# Altium PCB PCB1.PcbDoc
Units mil, origin at the board's own origin, x right, y up, seen from the top; angles counter-clockwise.
Board outline 6000 x 4000 mil, 2 copper layers (Top Layer, Bottom Layer); 97 components, 57 nets, 314 pads, 11 vias.
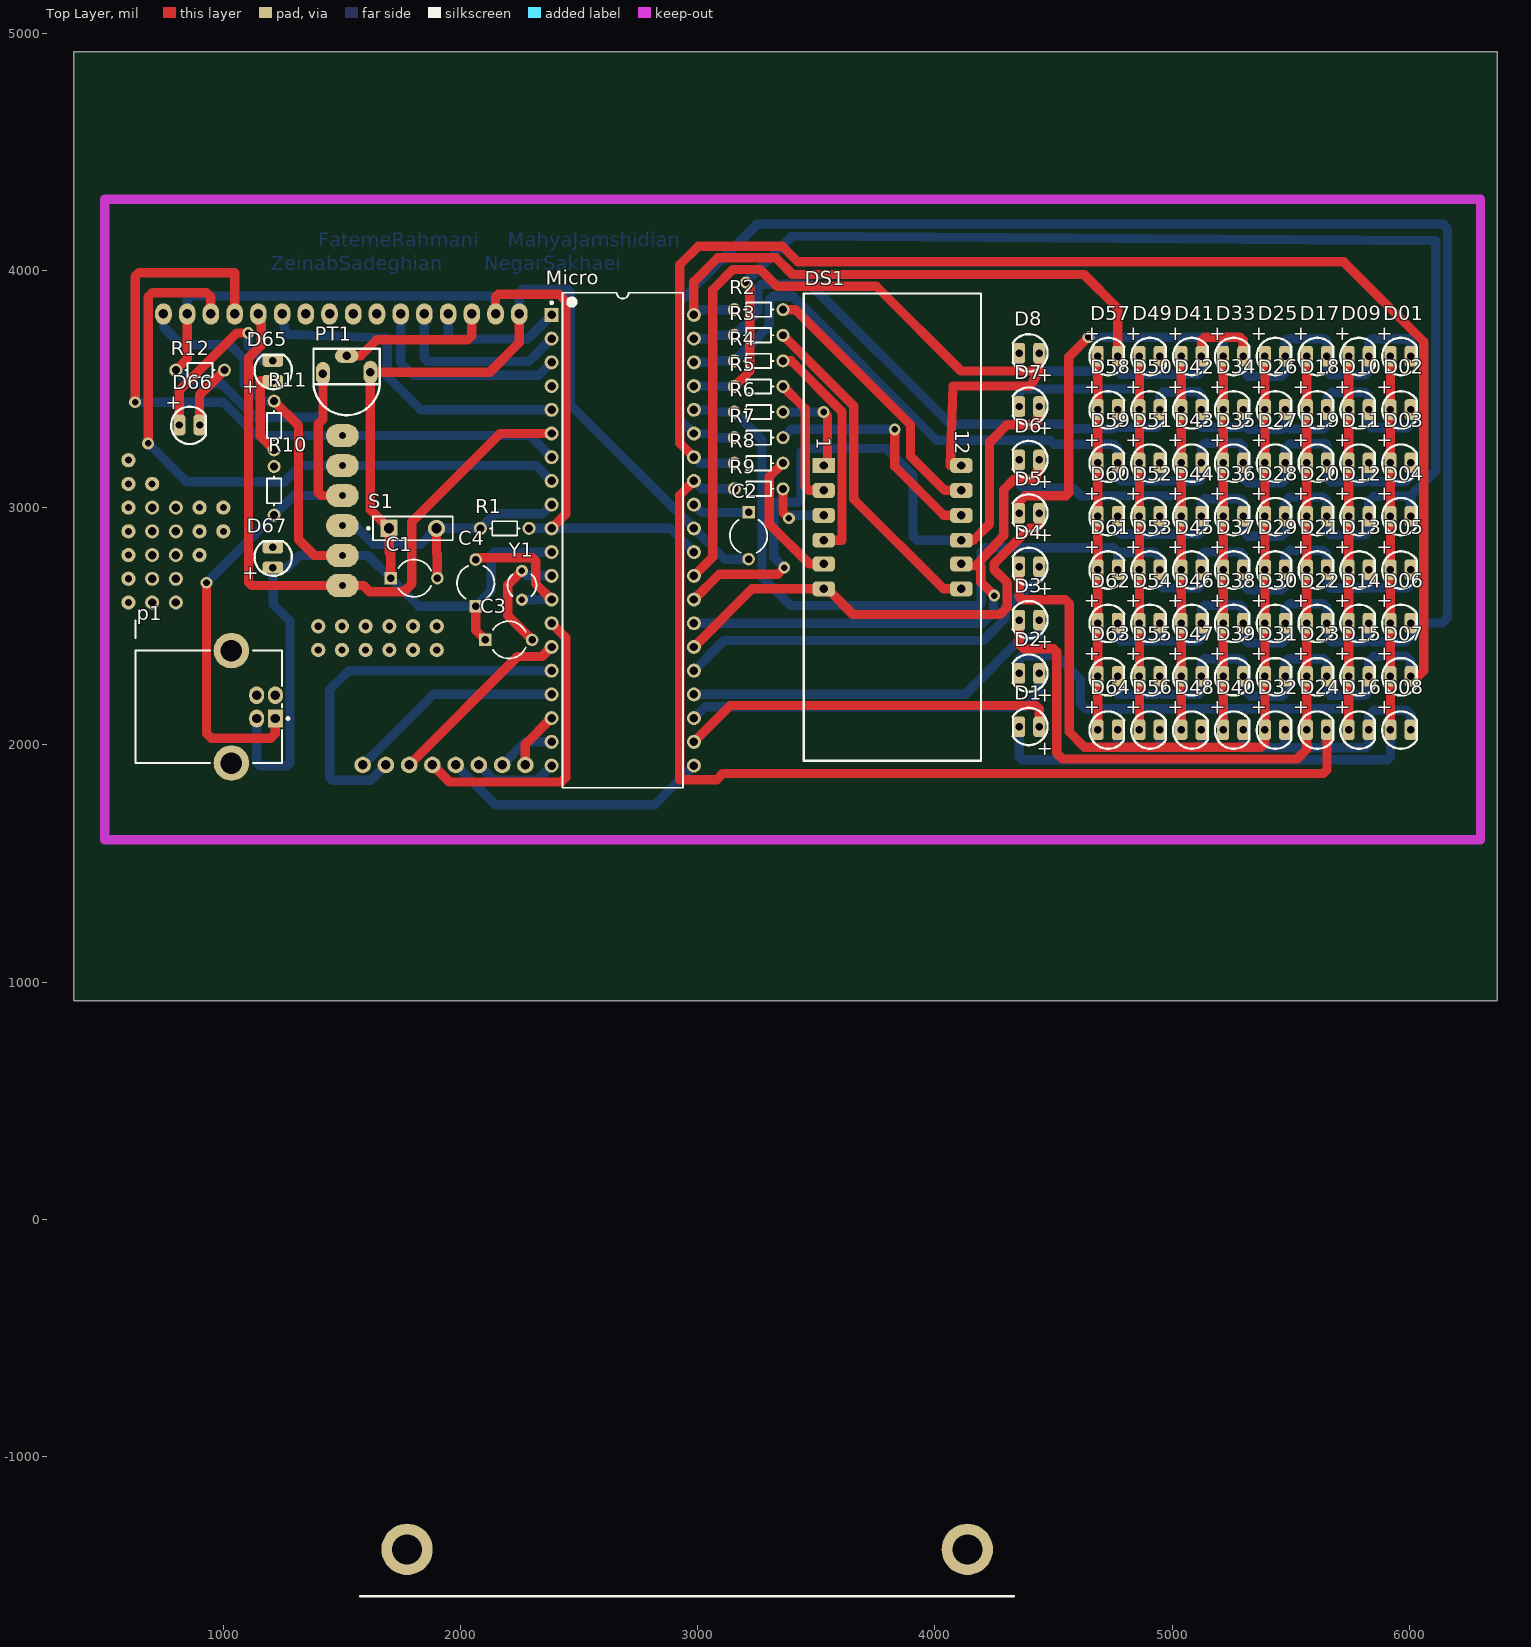
[diagram p0: Top Layer view]
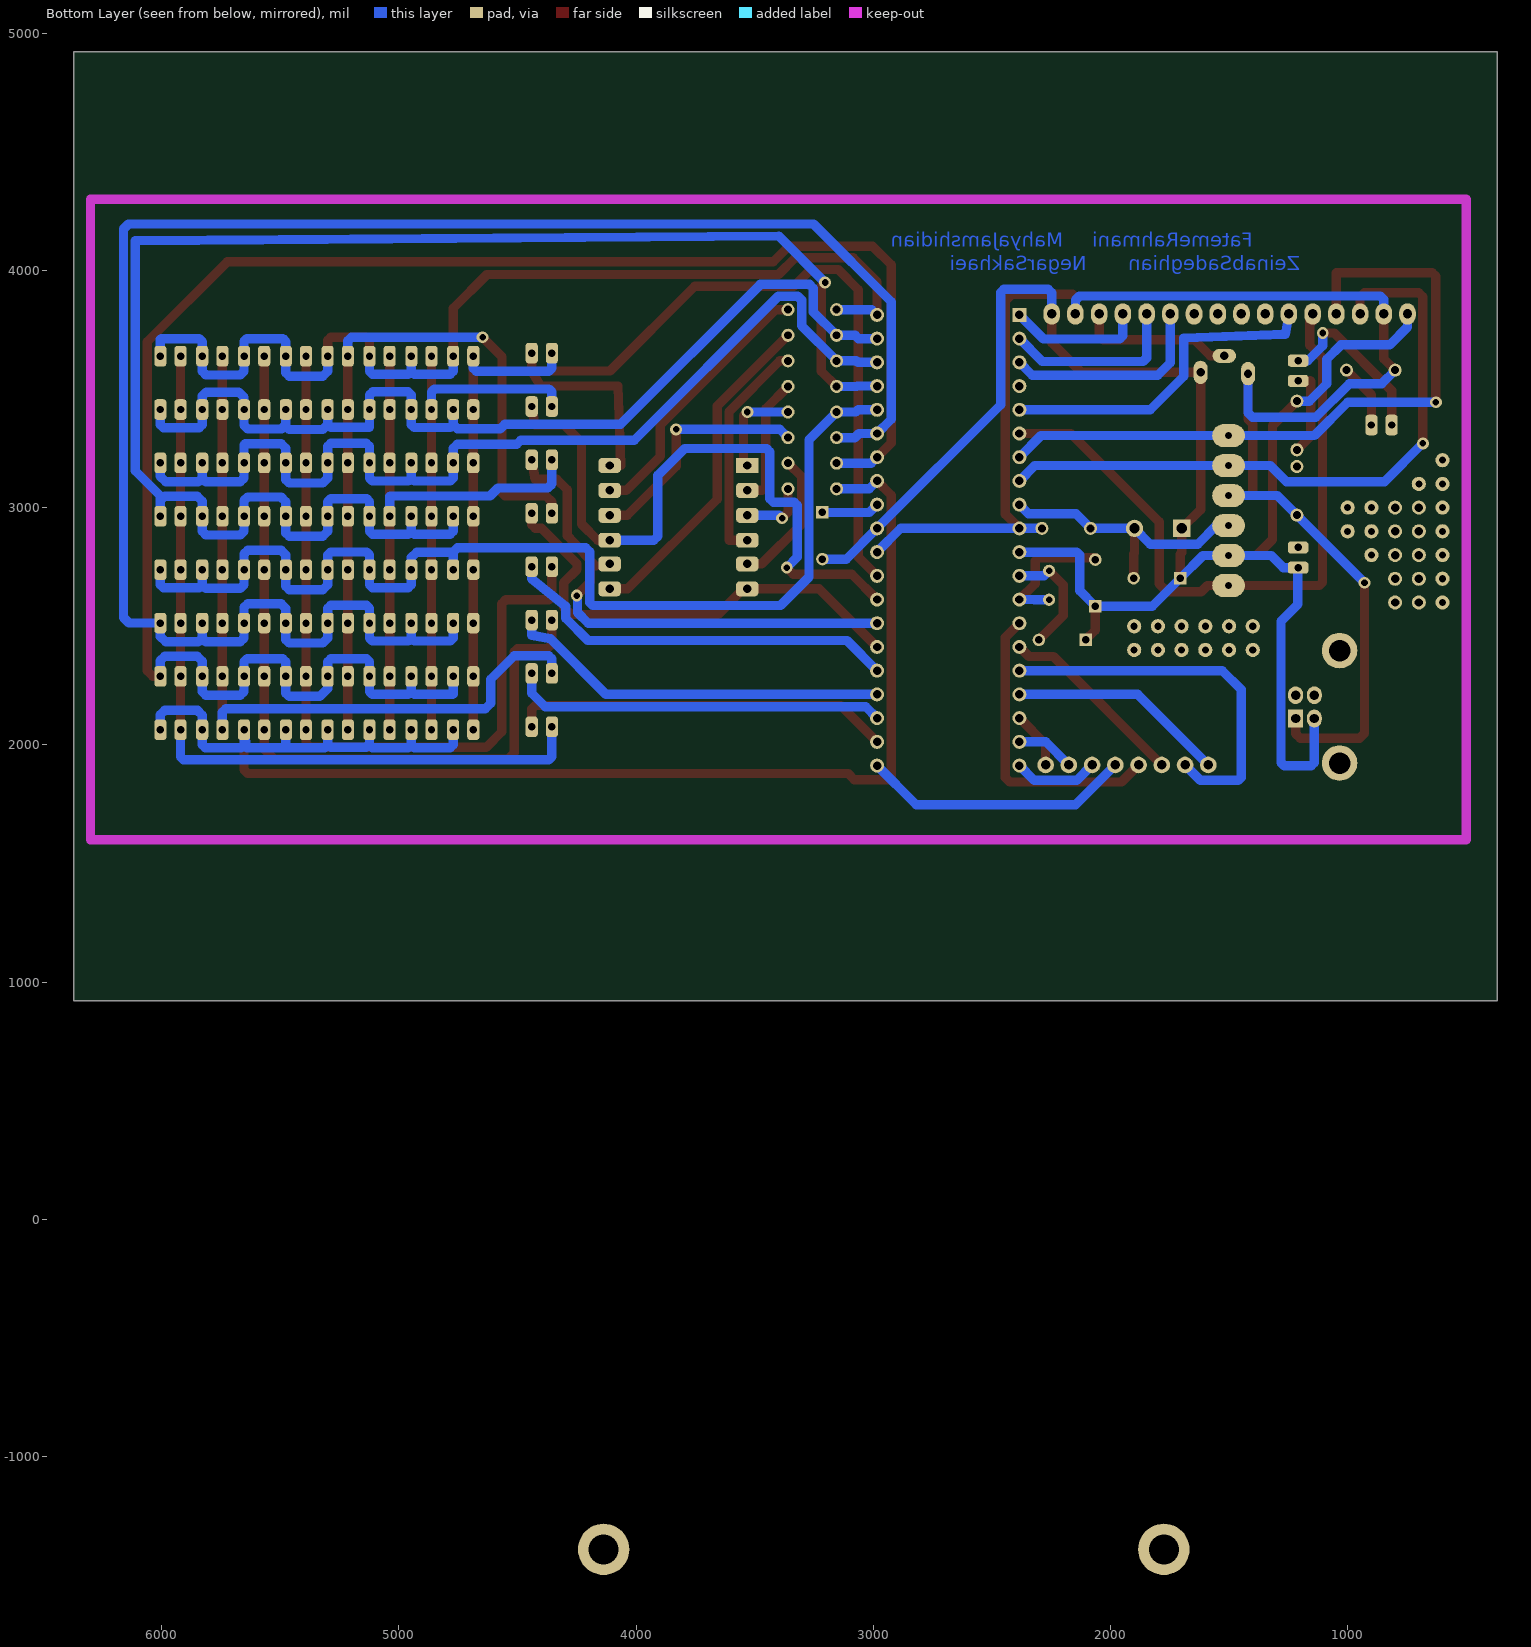
[diagram p1: Bottom Layer view, seen from below]

## Layer stack, top to bottom
Top Layer: signal copper 1.4
Dielectric: dielectric 12.6, FR-4, Dk 4.8
Bottom Layer: signal copper 1.4

## Board outline
370.08,921.26 6370.08,921.26 6370.08,4921.26 370.08,4921.26

## Design rules (kind name [scope] priority, off if disabled: settings)
Clearance [All] p1: gap=10
PolygonConnect [All] p1: connectstyle=Relief reliefconductorwidth=10 reliefentries=4 polygonreliefangle="90 Angle"
RoutingVias [All] p1: holewidth=28 width=50 viastyle="Through Hole" minholewidth=28 minwidth=50 maxholewidth=28 maxwidth=50
SilkscreenOverComponentPads [All] p1: minsilkscreentomaskgap=10
SolderMaskExpansion [All] p1: expansion=4
TestPointUsage [All] p1: valid=0 allowmultiple=FALSE
Testpoint [All] p1: side=15 testpointundercomponent=TRUE minsize=40 maxsize=100 preferedsize=60 minholesize=0 maxholesize=40 preferedholesize=32 testpointgrid=1 style=1023 order=0123456789
Width [All] p1: maxlimit=39.37 minlimit=0.3 preferedwidth=39.37
23 further rules are at their usual default settings.

## Classes and differential pairs
component class Sheet3: D65 D66 D67 D? R10 R11 R12
component class Sheet2: p1
component class Sheet4: D7 D8

## Components (designator, comment, footprint, x,y, rotation, side; value= is the part's Value field where it differs from the comment)
C1 "" CAPR5-4X5 1803.94,2702.52 r0 top
C2 "" CAPR5-4X5 3214.49,2881.26 r270 top
C3 "" CAPR5-4X5 2203.31,2442.52 r0 top
C4 "" CAPR5-4X5 2063.94,2682.52 r90 top
D1 "LED 3mm" LED-3mm 4399.96,2080.97 r270 top
D01 "LED 3mm" LED-3mm 5960.54,3633.68 r90 top
D2 "LED 3mm" LED-3mm 4399.96,2306.02 r270 top
D02 "LED 3mm" LED-3mm 5960.54,3408.63 r90 top
D3 "LED 3mm" LED-3mm 4399.96,2531.07 r270 top
D03 "LED 3mm" LED-3mm 5960.54,3183.57 r90 top
D4 "LED 3mm" LED-3mm 4399.96,2756.13 r270 top
D04 "LED 3mm" LED-3mm 5960.54,2958.52 r90 top
D5 "LED 3mm" LED-3mm 4399.96,2981.18 r270 top
D05 "LED 3mm" LED-3mm 5960.54,2733.47 r90 top
D6 "LED 3mm" LED-3mm 4399.96,3206.23 r270 top
D06 "LED 3mm" LED-3mm 5960.54,2508.41 r90 top
D7 "LED 3mm" LED-3mm 4399.96,3431.29 r270 top
D07 "LED 3mm" LED-3mm 5960.54,2283.36 r90 top
D8 "LED 3mm" LED-3mm 4399.96,3656.34 r270 top
D08 "LED 3mm" LED-3mm 5960.54,2058.31 r90 top
D09 "LED 3mm" LED-3mm 5784.2,3633.68 r90 top
D10 "LED 3mm" LED-3mm 5784.2,3408.63 r90 top
D11 "LED 3mm" LED-3mm 5784.2,3183.57 r90 top
D12 "LED 3mm" LED-3mm 5784.2,2958.52 r90 top
D13 "LED 3mm" LED-3mm 5784.2,2733.47 r90 top
D14 "LED 3mm" LED-3mm 5784.2,2508.41 r90 top
D15 "LED 3mm" LED-3mm 5784.2,2283.36 r90 top
D16 "LED 3mm" LED-3mm 5784.2,2058.31 r90 top
D17 "LED 3mm" LED-3mm 5607.87,3633.68 r90 top
D18 "LED 3mm" LED-3mm 5607.87,3408.63 r90 top
D19 "LED 3mm" LED-3mm 5607.87,3183.57 r90 top
D20 "LED 3mm" LED-3mm 5607.87,2958.52 r90 top
D21 "LED 3mm" LED-3mm 5607.87,2733.47 r90 top
D22 "LED 3mm" LED-3mm 5607.87,2508.41 r90 top
D23 "LED 3mm" LED-3mm 5607.87,2283.36 r90 top
D24 "LED 3mm" LED-3mm 5607.87,2058.31 r90 top
D25 "LED 3mm" LED-3mm 5431.53,3633.68 r90 top
D26 "LED 3mm" LED-3mm 5431.53,3408.63 r90 top
D27 "LED 3mm" LED-3mm 5431.53,3183.57 r90 top
D28 "LED 3mm" LED-3mm 5431.53,2958.52 r90 top
D29 "LED 3mm" LED-3mm 5431.53,2733.47 r90 top
D30 "LED 3mm" LED-3mm 5431.53,2508.41 r90 top
D31 "LED 3mm" LED-3mm 5431.53,2283.36 r90 top
D32 "LED 3mm" LED-3mm 5431.53,2058.31 r90 top
D33 "LED 3mm" LED-3mm 5255.19,3633.68 r90 top
D34 "LED 3mm" LED-3mm 5255.19,3408.63 r90 top
D35 "LED 3mm" LED-3mm 5255.19,3183.57 r90 top
D36 "LED 3mm" LED-3mm 5255.19,2958.52 r90 top
D37 "LED 3mm" LED-3mm 5255.19,2733.47 r90 top
D38 "LED 3mm" LED-3mm 5255.19,2508.41 r90 top
D39 "LED 3mm" LED-3mm 5255.19,2283.36 r90 top
D40 "LED 3mm" LED-3mm 5255.19,2058.31 r90 top
D41 "LED 3mm" LED-3mm 5078.86,3633.68 r90 top
D42 "LED 3mm" LED-3mm 5078.86,3408.63 r90 top
D43 "LED 3mm" LED-3mm 5078.86,3183.57 r90 top
D44 "LED 3mm" LED-3mm 5078.86,2958.52 r90 top
D45 "LED 3mm" LED-3mm 5078.86,2733.47 r90 top
D46 "LED 3mm" LED-3mm 5078.86,2508.41 r90 top
D47 "LED 3mm" LED-3mm 5078.86,2283.36 r90 top
D48 "LED 3mm" LED-3mm 5078.86,2058.31 r90 top
D49 "LED 3mm" LED-3mm 4902.52,3633.68 r90 top
D50 "LED 3mm" LED-3mm 4902.52,3408.63 r90 top
D51 "LED 3mm" LED-3mm 4902.52,3183.57 r90 top
D52 "LED 3mm" LED-3mm 4902.52,2958.52 r90 top
D53 "LED 3mm" LED-3mm 4902.52,2733.47 r90 top
D54 "LED 3mm" LED-3mm 4902.52,2508.41 r90 top
D55 "LED 3mm" LED-3mm 4902.52,2283.36 r90 top
D56 "LED 3mm" LED-3mm 4902.52,2058.31 r90 top
D57 "LED 3mm" LED-3mm 4726.18,3633.68 r90 top
D58 "LED 3mm" LED-3mm 4726.18,3408.63 r90 top
D59 "LED 3mm" LED-3mm 4726.18,3183.57 r90 top
D60 "LED 3mm" LED-3mm 4726.18,2958.52 r90 top
D61 "LED 3mm" LED-3mm 4726.18,2733.47 r90 top
D62 "LED 3mm" LED-3mm 4726.18,2508.41 r90 top
D63 "LED 3mm" LED-3mm 4726.18,2283.36 r90 top
D64 "LED 3mm" LED-3mm 4726.18,2058.31 r90 top
D65 "LED 3mm" LED-3mm 1214.01,3574.33 r180 top
D66 "LED 3mm" LED-3mm 854.64,3343.31 r90 top
D67 "LED 3mm" LED-3mm 1214.01,2786.93 r180 top
DS1 "7Segment-4Digit-CA" 7segCA 3446.46,3902.52 r270 top
Micro "ATmega32-16PU" 40P6 2683.94,2862.52 r0 top locked
p1 "USB Connector" USB2.5-2H4E 1180,2160 r180 top locked
PT1 "POT1" POT1 1380,3520 r0 top
R1 "Resistor vertical" Res50 2233.94,2912.52 r0 top
R2 "Resistor vertical" Res50 3304.45,3834.49 r0 top
R3 "Resistor vertical" Res50 3304.45,3726.61 r0 top
R4 "Resistor vertical" Res50 3304.45,3618.74 r0 top
R5 "Resistor vertical" Res50 3304.45,3510.87 r0 top
R6 "Resistor vertical" Res50 3304.45,3402.99 r0 top
R7 "Resistor vertical" Res50 3304.45,3295.12 r0 top
R8 "Resistor vertical" Res50 3304.45,3187.24 r0 top
R9 "Resistor vertical" Res50 3304.45,3079.37 r0 top
R10 "Resistor vertical" Res50 1214.01,3023.15 r270 top
R11 "Resistor vertical" Res50 1214.01,3298.74 r270 top
R12 "Resistor vertical" Res50 854.64,3579.53 r180 top
S1 "" SPST-2 1798.94,2912.52 r0 top
Y1 "" R38 2258.94,2672.52 r180 top

## Footprints (in the part's own frame and the unit in brackets; to place one, negate y for a bottom-side part, rotate by r counter-clockwise, add the part's x,y. Pads: shape width x height; smd on the part's side, far side on the other; paste and mask are expansions set on the pad)
7segCA [mm] "7seg-CA; 12 Leads"
  rect 1.6x2.4 hole 0.9: 1(18.415,2.159)
  rrect50% 1.6x2.4 hole 0.9: 2(21.082,2.159) 3(23.749,2.159) 4(26.416,2.159) 5(28.956,2.159) 6(31.623,2.159) 7(31.623,16.891) 8(28.956,16.891) 9(26.416,16.891) 10(23.749,16.891) 11(21.082,16.891) 12(18.415,16.891)
  silkscreen extent 0,0 50.04,19
40P6 [mm] "40-Pin Ceramic Dual In-Line Package (CerDIP)"
  rect 1.5x1.5 hole 0.9: 1(-7.62,24.13)
  round 1.5 hole 0.9: 2(-7.62,21.59) 3(-7.62,19.05) 4(-7.62,16.51) 5(-7.62,13.97) 6(-7.62,11.43) 7(-7.62,8.89) 8(-7.62,6.35) 9(-7.62,3.81) 10(-7.62,1.27) 11(-7.62,-1.27) 12(-7.62,-3.81) 13(-7.62,-6.35) 14(-7.62,-8.89) 15(-7.62,-11.43) 16(-7.62,-13.97) 17(-7.62,-16.51) 18(-7.62,-19.05) 19(-7.62,-21.59) 20(-7.62,-24.13) 21(7.62,-24.13) 22(7.62,-21.59) 23(7.62,-19.05) 24(7.62,-16.51) 25(7.62,-13.97) 26(7.62,-11.43) 27(7.62,-8.89) 28(7.62,-6.35) 29(7.62,-3.81) 30(7.62,-1.27) 31(7.62,1.27) 32(7.62,3.81) 33(7.62,6.35) 34(7.62,8.89) 35(7.62,11.43) 36(7.62,13.97) 37(7.62,16.51) 38(7.62,19.05) 39(7.62,21.59) 40(7.62,24.13)
  silkscreen extent -7.74,-26.5 6.45,26.5, body extent -7.05,-26.47 7.05,26.47, height 4.83
CAPR5-4X5 [mm] "Capacitor; 2 Leads"
  rect 1.35x1.35 hole 0.8: 1(-2.5,0)
  round 1.35 hole 0.8: 2(2.5,0)
  silkscreen extent -1.69,-2 1.82,2
LED-3mm [mm] "LED; 2 Leads"
  rrect50% 2.2x1.3 hole 0.8: 1(0.127,1.016) 2(0.127,-1.143)
  silkscreen extent -1.9,-1.81 2.09,1.89
POT1 [mm]
  oval 1.5x2.5 hole 0.9: 1(1.016,1.143) 2(6.096,1.27)
  oval 2.5x1.5 hole 0.9: 3(3.556,3.048)
  silkscreen extent 0,-3.31 7.11,3.81, body extent 0.13,-3.17 6.98,-0.13, height 0.7
R38 [mm] "Crystal, Thru-Hole; 2 Leads; Body 3.1 x 8.2 mm (Dia.xH)"
  round 1.3 hole 0.7: 1(0,1.55) 2(0,-1.55)
  silkscreen extent -1.55,-1.19 1.55,1.17
Res50 [mm] "50mm Pin Spacing"
  round 1.4 hole 0.85: 1(-3.81,0) 2(1.397,0)
  silkscreen extent -2.77,-0.76 0.38,0.76
SPST-2 [mm] "Circuit Breaker; 2 Leads"
  rect 1.85x1.85 hole 1.1: 1(-2.54,0)
  round 1.85 hole 1.1: 2(2.54,0)
  silkscreen extent -4.89,-1.27 4.28,1.27
USB2.5-2H4E [mm] "Connector; USB1.1, Type B, Thru-Hole; 4 Position; Right Angle"
  rect 1.6x1.9 hole 1: 1(-1,1.25)
  oval 1.6x1.9 hole 1: 2(-1,-1.25) 3(1,-1.25) 4(1,1.25)
  round 3.8 hole 2.3: 5(3.71,6.02) 6(3.71,-6.02)
  silkscreen extent -2.48,-6.02 13.99,6.02, body extent -2.5,-7.45 14,7.45, height 10.95

## Part data
C1 C2 C3 C4: library part Cap2, "Capacitor"
D1 D01 D2 D02 D3 D03 D4 D04 D5 D05 D6 D06 D7 D07 D8 D08 D09 D10 D11 D12 D13 D14 D15 D16 D17 D18 D19 D20 D21 D22 D23 D24 D25 D26 D27 D28 D29 D30 D31 D32 D33 D34 D35 D36 D37 D38 D39 D40 D41 D42 D43 D44 D45 D46 D47 D48 D49 D50 D51 D52 D53 D54 D55 D56 D57 D58 D59 D60 D61 D62 D63 D64 D65 D66 D67: "Typical LED"
DS1: library part 7Seg-4Digit-CA, "7-Segment Display: CA"
Micro: "8-bit AVR Microcontroller, 4.5-5.5V, 16MHz, 32KB Flash, 1024 Bytes EEPROM, 2KB SRAM, 40-pin PDIP, Industrial Grade (-40°C to 85°C)"
p1: library part USB, "USB Connector-B Type"
PT1: "Variable Potentiometer standing"
R1 R2 R3 R4 R5 R6 R7 R8 R9 R10 R11 R12: "Resistor 0.5"
S1: library part SW-PB, "Switch"
Y1: library part XTAL, "Crystal Oscillator"

## Free pads (board coordinates)
  oval 137.8x98.43 hole 30: 1(1502.05,2798.04) 2(1502.05,3050.89) 3(1502.05,2924.46) 4(1502.05,3177.31) 5(1502.05,3303.74) 6(1502.05,2671.61)
  oval 70x90 hole 40: 1(2247.72,3816.38) 2(2147.72,3816.38) 3(2047.72,3816.38) 4(1947.72,3816.38) 5(1847.72,3816.38) 6(1747.72,3816.38) 7(1647.72,3816.38) 8(1547.72,3816.38) 9(1447.72,3816.38) 10(1347.72,3816.38) 11(1247.72,3816.38) 12(1147.72,3816.38) 13(1047.72,3816.38) 14(947.72,3816.38) 15(847.72,3816.38) 16(747.72,3816.38)
  round 70 hole 40: 1(2273.61,1914.96) 2(2175.61,1914.96) 3(2077.61,1914.96) 4(1979.61,1914.96) 5(1881.61,1914.96) 6(1783.61,1914.96) 7(1685.61,1914.96) 8(1587.61,1914.96)
  round 59.06 hole 35.43: 5(800,2600) 6(700,2600) 7(800,2700) 8(700,2700) 9(800,2800) 10(700,2800) 11(800,2900) 12(700,2900) 13(800,3000) 14(700,3000)
  round 60 hole 30: 31(600,3000) 32(600,3100) 33(700,3100) 34(600,3200) 35(600,2900) 36(600,2800) 37(600,2700) 38(600,2600) 39(900,2800) 40(900,2900) 41(900,3000) 42(1000,3000) 43(1000,2900) 44(1400,2500) 45(1400,2400) 46(1500,2500) 47(1500,2400) 48(1600,2400) 49(1600,2500) 50(1700,2500) 51(1700,2400) 53(1800,2500) 54(1800,2400) 55(1900,2500) 56(1900,2400)
  round 216.54 hole 125.98: MH2(1774.65,-1392.13) MH3(4136.85,-1392.13)

## Via types
v1: diameter 50, hole 28, Top Layer to Bottom Layer, 11 vias

## Nets (pads, with @x,y where several pads share a name; then routed paths per layer and width w, separated by ;. In a path a pad name is that pad's centre, name@x,y a point inside that pad or via, vN(x,y) a via of type N, cw(c..) or ccw(c..) an arc to the next point about the centre after c; other vN are vias at no path point)
GND: C1.1 C2.2 C3.1 C4.1 D67.1 Micro.11 Micro.31 p1.4 pad.1@1502.05,2798.04 pad.1@2247.72,3816.38 pad.16 PT1.2 R11.1 S1.1 | length 7877.6
  Top Layer w39.37: R11.1 1317,3345.76 1317,2865.5 1384.46,2798.04 pad.1@1502.05,2798.04 ; C1.1 1705.51,2804 1698.94,2810.57 S1.1 1620,2991.46 PT1.2 2122,3570 2247.72,3695.72 pad.1@2247.72,3816.38 ; C4.1 2063.94,2483.46 C3.1
  Bottom Layer w39.37: pad.16 747.72,3761.28 823,3686 1027.93,3686 1088.46,3625.48 1088.46,3522.29 1162,3448.74 R11.1 ; p1.4 1140.63,1925 1153.63,1912 1268,1912 1281,1925 1281,2521 1210,2592 D67.1@1210,2746.93 ; D67.1 D67.1@1210,2746.93 ; pad.1@2247.72,3816.38 2247.72,3905.22 2262.5,3920 2450,3920 2463,3907 2463,3433.46 Micro.31 3113.62,2782.84 C2.2 ; Micro.11 2142.52,2812.52 2130,2800 2130,2650.16 C4.1 1823.94,2584.09 C1.1 1609.99,2798.04 1502.05,2798.04 1322,2798.04 1270.89,2746.93 D67.1@1210,2746.93
NetC1_2: C1.2 Micro.9 pad.3@1502.05,2924.46 R1.1 S1.2 | length 1194.8
  Top Layer w39.37: S1.2 1898.94,2808.42 1902.36,2805 C1.2
  Bottom Layer w39.37: pad.3@1502.05,2924.46 1553.54,2924.46 1632,2846 1832.42,2846 S1.2 R1.1 2145.42,2974 2345.42,2974 Micro.9
NetC2_1: C2.1 Micro.32 | length 244.2
  Bottom Layer w39.37: Micro.32 3016.77,2979.69 C2.1
NetC3_2: C3.2 Micro.12 Y1.2 | length 492.1
  Top Layer w39.37: Y1.2 2199,2673.61 2199,2545.25 C3.2
  Bottom Layer w39.37: Y1.2 2279.96,2712.52 Micro.12
NetC4_2: C4.2 Micro.13 Y1.1 | length 582.5
  Top Layer w39.37: C4.2 2063.94,2789 2303,2789 2317,2775 2317,2679.46 Micro.13
  Bottom Layer w39.37: Y1.1 2320,2611.5 2321.02,2612.52 Micro.13
NetD1_1: D1.1 Micro.22 | length 1600.9
  Top Layer w39.37: Micro.22 3137.42,2166 4425,2166 4439.96,2151.04 D1.1
NetD01_1: D01.1 D1.2 D02.1 D03.1 D04.1 D05.1 D06.1 D07.1 D08.1 | length 3390.6
  Top Layer w39.37: D08.1 D07.1 D06.1 D05.1 D04.1 D03.1 D02.1 D01.1
  Bottom Layer w39.37: D1.2 4354.96,1950 4367.46,1937.5 5908.04,1937.5 5920.54,1950 D08.1
NetD01_2: D01.2 D09.2 D17.2 D25.2 D33.2 D41.2 D49.2 D57.2 Micro.40 R2.1 | length 4588.5
  Top Layer w39.37: Micro.40 2983.94,3952.44 3084.56,4053.06 3329.44,4053.06 3399.5,3983 4629,3983 4771.18,3840.82 D57.2 ; D41.2 5123.85,3704.35 5137.5,3718 5287.5,3718 5300.19,3705.31 D33.2
  Bottom Layer w39.37: Micro.40 3005.91,3834.49 R2.1 ; D57.2 4771.18,3575 4783.68,3562.5 4935.02,3562.5 4947.52,3575 ; D49.2 4947.52,3575 ; D41.2 5123.85,3575 5111.35,3562.5 4960.02,3562.5 4947.52,3575 ; D33.2 5300.19,3575 5321.14,3554.06 5462.5,3554.06 5476.53,3568.08 D25.2 5476.53,3700 5489.06,3712.53 5641.47,3712.53 5652.87,3701.13 D17.2 5652.87,3575 5668.46,3559.4 5813.61,3559.4 5829.2,3575 D09.2 5829.2,3700 5841.7,3712.5 6001.5,3712.5 6005.54,3708.46 D01.2
NetD2_1: D2.1 Micro.23 | length 1583.3
  Bottom Layer w39.37: Micro.23 3031.42,2160 4382.96,2160 4439.96,2217 D2.1
NetD2_2: D2.2 D09.1 D10.1 D11.1 D12.1 D13.1 D14.1 D15.1 D16.1 | length 3264.1
  Top Layer w39.37: D16.1 D15.1 D14.1 D13.1 D12.1 D11.1 D10.1 D09.1
  Bottom Layer w39.37: D2.2 4354.96,2362.5 4368.46,2376 4513.5,2376 4613,2276.5 4613,2175 4636,2152 5729.7,2152 5744.2,2137.5 D16.1
NetD02_2: D02.2 D10.2 D18.2 D26.2 D34.2 D42.2 D50.2 D58.2 Micro.39 R3.1 | length 4276.9
  Bottom Layer w39.37: Micro.39 3062,3712.52 3076.09,3726.61 R3.1 3252.84,3825 3252.84,3925 3268.94,3941.1 3475.9,3941.1 4066,3351 4553,3351 4572,3332 4753.18,3332 4771.18,3350 ; D58.2 4771.18,3350 ; D34.2 5300.19,3351.77 ; D26.2 5476.53,3350 ; D02.2 6005.54,3350 5992.62,3337.08 5842.12,3337.08 5829.2,3350 D10.2 5829.2,3470.3 5812.5,3487 5675,3487 5652.87,3464.87 D18.2 5652.87,3347.1 5637.5,3331.73 5494.8,3331.73 5476.53,3350 ; 4771.18,3350 4783.68,3337.5 4935.02,3337.5 4947.52,3350 D50.2 4947.52,3475 4961.52,3489 5109.85,3489 5123.85,3475 D42.2 5123.85,3340.03 5124.81,3339.08 5287.5,3339.08 5300.19,3351.77 ; 5300.19,3351.77 5300.19,3350 5321.14,3329.06 5462.5,3329.06 5476.53,3343.08 5476.53,3350
NetD3_1: D3.1 Micro.24 | length 1618.7
  Bottom Layer w39.37: Micro.24 4126.47,2212.52 4360.95,2447 4439.96,2461.96 D3.1
NetD3_2: D3.2 D17.1 D18.1 D19.1 D20.1 D21.1 D22.1 D23.1 D24.1 | length 3439.1
  Top Layer w39.37: D3.2 4354.96,2425 4374.96,2405 4500,2405 4513,2392 4513,1966 4539,1940 5526.87,1940 5567.87,1981 D24.1 D23.1 D22.1 D21.1 D20.1 D19.1 D18.1 D17.1
NetD03_2: D03.2 D11.2 D19.2 D27.2 D35.2 D43.2 D51.2 D59.2 Micro.38 R4.1 | length 4399.1
  Bottom Layer w39.37: Micro.38 3066,3612.52 3072.22,3618.74 R4.1 3302.21,3766.5 3302.21,3875 3318.94,3891.73 3400,3891.73 4007.73,3284 4486,3284 4503,3267 4754.18,3267 4771.18,3250 D59.2 4771.18,3125 4783.68,3112.5 4935.02,3112.5 4947.52,3125 ; D51.2 4947.52,3125 ; D11.2 5829.2,3125 ; D03.2 6005.54,3131.54 5983,3109 5845.2,3109 5829.2,3125 ; 4947.52,3125 4960.02,3112.5 5111.35,3112.5 5123.85,3125 D43.2 5123.85,3258.21 5137.5,3271.85 5287.5,3271.85 5300.19,3259.16 D35.2 5300.19,3125 5321.14,3104.06 5462.5,3104.06 5476.53,3118.08 D27.2 5476.53,3250 5495.53,3269 5648,3269 5652.87,3264.13 D19.2 5652.87,3125 5668.46,3109.4 5813.61,3109.4 5829.2,3125
NetD4_1: D4.1 Micro.25 | length 1690.5
  Bottom Layer w39.37: Micro.25 3111.05,2439.63 4203.19,2439.63 4296.74,2533.18 4296.74,2583.98 4439.96,2699.85 D4.1
NetD4_2: D4.2 D25.1 D26.1 D27.1 D28.1 D29.1 D30.1 D31.1 D32.1 | length 3381
  Top Layer w39.37: D4.2 4354.96,2625 4368.96,2611 4550,2611 4566,2595 4566,2055 4631,1990 5375,1990 5391.53,2006.53 D32.1 D31.1 D30.1 D29.1 D28.1 D27.1 D26.1 D25.1
NetD04_2: D04.2 D12.2 D20.2 D28.2 D36.2 D44.2 D52.2 D60.2 Micro.37 R5.1 | length 6927.1
  Top Layer w39.37: R5.1 3219,3575.42 3219,3933 v1(3203,3949)
  Bottom Layer w39.37: Micro.37 3068,3512.52 3069.65,3510.87 R5.1 ; v1(3203,3949) 3399,4145 6111,4125 6111,3155.46 6005.54,3050 6005.54,3029.96 ; D60.2 4771.18,2900 4783.68,2887.5 4935.02,2887.5 4947.52,2900 ; D52.2 4947.52,2900 ; D04.2 6005.54,3029.96 ; 4947.52,2900 4960.02,2887.5 5111.35,2887.5 5123.85,2900 D44.2 5123.85,3025 5136.85,3038 5287.5,3038 5300.19,3025.31 D36.2 5300.19,2900 5321.14,2879.06 5462.5,2879.06 5476.53,2893.08 D28.2 5476.53,3025 5496.53,3045 5637.5,3045 5652.87,3029.63 D20.2 5652.87,2900 5668.46,2884.4 5813.61,2884.4 5829.2,2900 D12.2 5829.2,3027.2 5850,3048 5987.5,3048 6005.54,3029.96
NetD5_1: D5.1 DS1.6 Micro.26 | length 1993.4
  Top Layer w39.37: Micro.26 3228.94,2657.52 DS1.6 3547,2657.52 3654.99,2549.53 4274.6,2549.53 4304.69,2579.62 4304.69,2683.91 4249,2739.59 4249,2763 4399,2913 4425,2913 4439.96,2927.96 D5.1
NetD5_2: D5.2 D33.1 D34.1 D35.1 D36.1 D37.1 D38.1 D39.1 D40.1 | length 3177.2
  Top Layer w39.37: D5.2 4354.96,3023.96 4381,3050 4552.5,3050 4565,3062.5 4565,3636 v1(4647,3718) ; D40.1 D39.1 D38.1 D37.1 D36.1 D35.1 D34.1 D33.1
  Bottom Layer w39.37: v1(4647,3718) 5200,3718 5215.19,3702.81 D33.1
NetD05_2: D05.2 D13.2 D21.2 D29.2 D37.2 D45.2 D53.2 D61.2 Micro.36 R6.1 | length 4847
  Bottom Layer w39.37: Micro.36 3064,3412.52 3073.53,3402.99 R6.1 3271,3286.44 3271,2707.78 3391.28,2587.5 4182.5,2587.5 4195,2600 4195,2813.5 4212.5,2831 4752.68,2831 4771.18,2812.5 4771.18,2811 ; D61.2 4771.18,2811 ; D13.2 5829.2,2675 ; D05.2 6005.54,2675 5992.62,2662.08 5842.12,2662.08 5829.2,2675 ; 4771.18,2811 4772.36,2812.18 4925,2812.18 4947.52,2789.66 D53.2 4947.52,2675 4960.02,2662.5 5111.35,2662.5 5123.85,2675 D45.2 5123.85,2800 5136.85,2813 5287.5,2813 5300.19,2800.31 D37.2 5300.19,2675 5321.14,2654.06 5462.5,2654.06 5476.53,2668.08 D29.2 5476.53,2800 5496.53,2820 5637.5,2820 5652.87,2804.63 D21.2 5652.87,2675 5668.46,2659.4 5813.61,2659.4 5829.2,2675
NetD6_1: D6.1 DS1.8 Micro.27 | length 2184.4
  Top Layer w39.37: DS1.8 4178.89,2752.17 ; v1(4250,2629) 4193,2686 4193,2750 4178.89,2752.17 ; D6.1 4425,3118.92 4333.92,3118.92 4290,3075 4290,2881.3 4180.48,2762.52 4180.48,2753.76 4178.89,2752.17
  Bottom Layer w39.37: Micro.27 4201.52,2512.52 4247,2558 4247,2626 v1(4250,2629)
NetD6_2: D6.2 D41.1 D42.1 D43.1 D44.1 D45.1 D46.1 D47.1 D48.1 | length 2465.9
  Top Layer w39.37: D48.1 D47.1 D46.1 D45.1 D44.1 D43.1 D42.1 D41.1
  Bottom Layer w39.37: D6.2 4354.96,3100 4371.96,3083 4582,3083 4616,3049 5036.85,3049 5038.85,3047 D44.1
NetD06_2: D06.2 D14.2 D22.2 D30.2 D38.2 D46.2 D54.2 D62.2 Micro.35 R7.1 | length 8025.6
  Bottom Layer w39.37: R7.1 3077.4,3295.12 3060,3312.52 Micro.35 2924,3372.46 2924,3868 3252,4196 6140,4196 6161,4175 6161,2536.91 6137.5,2513.41 D06.2 6005.54,2456.54 5983,2434 5845.2,2434 5829.2,2450 ; D62.2 4771.18,2450 4783.68,2437.5 4935.02,2437.5 4947.52,2450 ; D54.2 4947.52,2450 ; D14.2 5829.2,2450 ; 4947.52,2450 4960.02,2437.5 5111.35,2437.5 5123.85,2450 D46.2 5123.85,2575 5136.85,2588 5287.5,2588 5300.19,2575.31 D38.2 5300.19,2450 5321.14,2429.06 5462.5,2429.06 5476.53,2443.08 D30.2 5476.53,2575 5496.53,2595 5637.5,2595 5652.87,2579.63 D22.2 5652.87,2450 5668.46,2434.4 5813.61,2434.4 5829.2,2450
NetD7_1: D7.1 DS1.9 Micro.28 | length 2831.1
  Top Layer w39.37: Micro.28 3090.42,2719 3337,2719 v1(3365,2747) ; DS1.9 4161.85,2862.52 4230,2930.67 4230,3275 4305,3350 4427.46,3350 D7.1
  Bottom Layer w39.37: v1(3365,2747) 3320.37,2791.63 3320.37,3009.71 3332.79,3022.13 3420.63,3022.13 3436,3037.5 3436,3235 3450,3249 3795,3249 3908,3136 3908,2879.52 3925,2862.52 DS1.9
NetD7_2: D7.2 D49.1 D50.1 D51.1 D52.1 D53.1 D54.1 D55.1 D56.1 | length 2228.4
  Top Layer w39.37: D56.1 D55.1 D54.1 D53.1 D52.1 D51.1 D50.1 D49.1
  Bottom Layer w39.37: D7.2 4354.96,3487.5 4367.46,3500 4850.02,3500 4862.52,3487.5 D50.1
NetD07_2: D07.2 D15.2 D23.2 D31.2 D39.2 D47.2 D55.2 D63.2 Micro.34 R8.1 | length 7952.8
  Top Layer w39.37: Micro.34 2924,3272.46 2924,4023.5 3002.93,4102.43 3356.43,4102.43 3421.85,4037 5723,4037 6061,3699 6061,2312.5 6037.5,2289 6005.54,2289 D07.2
  Bottom Layer w39.37: Micro.34 3009.21,3187.24 R8.1 ; D63.2 4771.18,2214 4772.68,2212.5 4935.02,2212.5 4947.52,2225 ; D55.2 4947.52,2225 ; D07.2 6005.54,2354.96 5987.5,2373 5850,2373 5829.2,2352.2 D15.2 5829.2,2225 5813.61,2209.4 5668.46,2209.4 5652.87,2225 D23.2 5652.87,2350 5639.87,2363 5489.53,2363 5476.53,2350 D31.2 5476.53,2218.08 5462.5,2204.06 5333.64,2204.06 5300.19,2237.5 D39.2 5300.19,2350.31 5287.5,2363 5136.85,2363 5123.85,2350 D47.2 5123.85,2225 5111.35,2212.5 4960.02,2212.5 4947.52,2225
NetD8_1: D8.1 DS1.12 Micro.29 | length 3686
  Top Layer w39.37: Micro.29 3063,2791.58 3063,3918.69 3148,4003.69 3264,4003.69 3334.69,3933 3753,3933 4110,3576 4439.96,3576 ; DS1.12 4063.98,3177.52 4064.05,3179.29 4076.48,3512.5 4402.46,3512.5 4439.96,3576 ; D8.1 4439.96,3576
NetD8_2: D8.2 D57.1 D58.1 D59.1 D60.1 D61.1 D62.1 D63.1 D64.1 | length 2032
  Top Layer w39.37: D64.1 D63.1 D62.1 D61.1 D60.1 D59.1 D58.1 D57.1
  Bottom Layer w39.37: D8.2 4354.96,3587.5 4367.46,3575 4673.68,3575 4686.18,3587.5 D57.1
NetD08_2: D08.2 D16.2 D24.2 D32.2 D40.2 D48.2 D56.2 D64.2 Micro.33 R9.1 | length 6482.1
  Top Layer w39.37: Micro.33 2924,3052.58 2924,1854 2925,1853 3080,1853 3106,1879 5637.5,1879 5652.87,1894.37 D24.2
  Bottom Layer w39.37: Micro.33 3017.09,3079.37 R9.1 ; D64.2 4771.18,2000 4783.68,1987.5 4935.02,1987.5 4947.52,2000 ; D56.2 4947.52,2000 ; D48.2 5123.85,2003.8 ; D40.2 5300.19,2002.84 ; D32.2 5476.53,2000 5464.03,1987.5 ; D08.2 6005.54,2126.96 5987.5,2145 5849.2,2145 5829.2,2125 D16.2 5829.2,2000 5816.7,1987.5 5665.37,1987.5 5652.87,2000 D24.2 5640.37,1987.5 5464.03,1987.5 ; 4947.52,2000 4960.02,1987.5 5111.35,1987.5 5123.85,2000 5123.85,2003.8 ; 5123.85,2003.8 5137.5,1990.15 5287.5,1990.15 5300.19,2002.84 ; 5300.19,2002.84 5300.19,2000 5312.69,1987.5 ; 5312.69,1987.5 5464.03,1987.5 ; 5312.69,1987.5 5464.03,1987.5
NetD65_1: D65.1 R11.2 | length 367
  Top Layer w39.37: D65.1 1157,3534.33 1156,3533.33 1156,3301.76 R11.2
NetD65_2: D65.2 D66.1 | length 719.9
  Top Layer w39.37: D66.1 814.64,3493.64 1057,3736 v1(1105,3736)
  Bottom Layer w39.37: v1(1105,3736) 1105,3682.33 1168,3619.33 D65.2
NetD66_2: D66.2 R12.1 | length 274.7
  Top Layer w39.37: D66.2 899.64,3474.53 R12.1
NetDS1_1: DS1.1 R6.2 | length 419.1
  Top Layer w39.37: v1(3530.82,3402.99) 3547,3386.82 3547,3177.52 DS1.1
  Bottom Layer w39.37: R6.2 v1(3530.82,3402.99)
NetDS1_2: DS1.2 R5.2 | length 546.8
  Top Layer w39.37: R5.2 3452.98,3417.34 3452.98,3087.5 3467.96,3072.52 DS1.2
NetDS1_3: DS1.3 R9.2 | length 286.9
  Top Layer w39.37: R9.2 3359.45,2980.02 v1(3384.45,2955.02)
  Bottom Layer w39.37: v1(3384.45,2955.02) 3396.95,2967.52 DS1.3
NetDS1_4: DS1.4 R4.2 | length 955.7
  Top Layer w39.37: R4.2 3393.95,3618.74 3608.39,3404.3 3608.39,2863.91 3607,2862.52 DS1.4
NetDS1_5: DS1.5 R8.2 | length 579
  Top Layer w39.37: R8.2 3302,3129.79 3302,2931.41 3470.89,2762.52 DS1.5
NetDS1_7: DS1.7 R3.2 | length 1424.8
  Top Layer w39.37: R3.2 3657.76,3428.31 3657.76,3035.76 4036,2657.52 DS1.7
NetDS1_10: DS1.10 R7.2 | length 1008
  Top Layer w39.37: v1(3831,3330) 3831,3174.02 4037.5,2967.52 DS1.10
  Bottom Layer w39.37: R7.2 3394.33,3330 v1(3831,3330)
NetDS1_11: DS1.11 R2.2 | length 1145.4
  Top Layer w39.37: R2.2 3412.5,3834.49 3897.39,3349.59 3897.39,3216.74 4041.62,3072.52 DS1.11
NetKBD1_1: Micro.18 pad.1@2273.61,1914.96 | length 243.3
  Top Layer w39.37: pad.1@2273.61,1914.96 2273.61,2002.19 Micro.18
NetKBD1_2: Micro.19 pad.2@2175.61,1914.96 | length 248.7
  Bottom Layer w39.37: pad.2@2175.61,1914.96 2273.17,2012.52 Micro.19
NetKBD1_3: Micro.20 pad.3@2077.61,1914.96 | length 359.1
  Bottom Layer w39.37: pad.3@2077.61,1914.96 2142.57,1850 2321.42,1850 Micro.20
NetKBD1_4: Micro.21 pad.4@1979.61,1914.96 | length 1142.5
  Bottom Layer w39.37: pad.4@1979.61,1914.96 2147.57,1747 2818.42,1747 Micro.21
NetKBD1_5: Micro.14 pad.5@1881.61,1914.96 | length 1275.5
  Top Layer w39.37: pad.5@1881.61,1914.96 1953.57,1843 2425,1843 2444,1862 2444,2452.46 Micro.14
NetKBD1_6: Micro.15 pad.6@1783.61,1914.96 | length 806.4
  Top Layer w39.37: pad.6@1783.61,1914.96 2240.65,2372 2343.42,2372 Micro.15
NetKBD1_7: Micro.16 pad.7@1685.61,1914.96 | length 1607.1
  Bottom Layer w39.37: pad.7@1685.61,1914.96 1620.65,1850 1461.5,1850 1449,1862.5 1449,2233 1528.52,2312.52 Micro.16
NetKBD1_8: Micro.17 pad.8@1587.61,1914.96 | length 919.6
  Bottom Layer w39.37: pad.8@1587.61,1914.96 1885.17,2212.52 Micro.17
NetLCD1_3: pad.3@2047.72,3816.38 PT1.3 | length 654.3
  Top Layer w39.37: PT1.3 1579,3640 1647,3708 2030.72,3708 2047.72,3725 pad.3@2047.72,3816.38
NetLCD1_4: Micro.1 pad.4@1947.72,3816.38 | length 575.4
  Bottom Layer w39.37: pad.4@1947.72,3816.38 1947.72,3725 1961.72,3711 2282.42,3711 Micro.1
NetLCD1_5: Micro.2 pad.5@1847.72,3816.38 | length 767.9
  Bottom Layer w39.37: pad.5@1847.72,3816.38 1847.72,3630.78 1862.5,3616 2287.42,3616 Micro.2
NetLCD1_6: Micro.3 pad.6@1747.72,3816.38 | length 886.1
  Bottom Layer w39.37: pad.6@1747.72,3816.38 1747.72,3611 1800.72,3558 2329.42,3558 Micro.3
NetLCD1_11: Micro.5 pad.11@1247.72,3816.38 | length 1428
  Bottom Layer w39.37: pad.11@1247.72,3816.38 1262.5,3731 1691,3715 1691,3554 1832.48,3412.52 Micro.5
NetLCD1_12: Micro.6 pad.6@1502.05,2671.61 pad.12@1147.72,3816.38 | length 2888.3
  Top Layer w39.37: pad.12@1147.72,3816.38 1147.72,3785.65 1159.71,3785.65 1159.71,3684.51 1106,3630.79 1106,2685.61 1120,2671.61 1502.05,2671.61 1591,2671.61 1616.61,2646 1762,2646 1795,2679 1795,2940 2167.52,3312.52 Micro.6
NetLCD1_13: Micro.7 pad.5@1502.05,3303.74 pad.13@1047.72,3816.38 | length 2982
  Top Layer w39.37: v1(628,3444) 628,3975 643,3990 1047,3990 1047.72,3989.28 pad.13@1047.72,3816.38
  Bottom Layer w39.37: v1(628,3444) 1000,3444 1140.26,3303.74 1502.05,3303.74 2292.72,3303.74 Micro.7
NetLCD1_14: Micro.8 pad.4@1502.05,3177.31 pad.14@947.72,3816.38 | length 2791.7
  Top Layer w39.37: v1(683,3271) 683,3889 700,3906 929.22,3906 947.72,3887.5 pad.14@947.72,3816.38
  Bottom Layer w39.37: v1(683,3271) 845,3109 1258,3109 1326.31,3177.31 1502.05,3177.31 2319.14,3177.31 Micro.8
VCC: Micro.10 Micro.30 p1.1 pad.2@1502.05,3050.89 pad.2@2147.72,3816.38 pad.15 PT1.1 R1.2 R10.2 R12.2 | length 7016.4
  Top Layer w39.37: R12.2 847.72,3627.6 pad.15 ; v1(929,2683.14) 929,2049 950,2028 1200,2028 1219.37,2047.37 p1.1 ; PT1.1 1420,3373 1400,3353 1400,3063.39 1412.5,3050.89 pad.2@1502.05,3050.89 ; pad.2@2147.72,3816.38 2147.72,3887.5 2160.22,3900 2415,3900 2444,3871 2444,2972.58 Micro.10
  Bottom Layer w39.37: R12.2 856.89,3522.29 992.71,3522.29 1134,3381 1401,3381 1420,3400 PT1.1 ; pad.15 847.72,3877.22 862.5,3892 2130.72,3892 2147.72,3875 pad.2@2147.72,3816.38 ; v1(929,2683.14) R10.2 1296.75,3050.89 pad.2@1502.05,3050.89 ; R1.2 Micro.10 2883.94,2912.52 Micro.30
pads on no net: D67.2 Micro.4 p1.2 p1.3 p1.5 p1.6 R10.1

## Keep-outs
Keep-Out Layer:
  lines w39.37: 500,1600 6300,1600 6300,4300 500,4300 500,1600

## Other copper
Bottom Layer:
  text "FatemeRahmani" at 1400,4100 h60
  text "MahyaJamshidian" at 2200,4100 h60
  text "ZeinabSadeghian" at 1200,4000 h60
  text "NegarSakhaei" at 2100,4000 h60

## Silkscreen, mask and mechanical layers (free items; w line width, h text height)
Top Overlay:
  lines w7.87: 630,2450 630,2525
  lines w10: 1577.8,-1588.98 4333.7,-1588.98

## Text inside footprints (layer, text, board x,y; h text height)
D1: Top Overlay "+" at 4429.96,1955.97 h60
D01: Top Overlay "+" at 5930.54,3758.68 h60 r180
D2: Top Overlay "+" at 4429.96,2181.02 h60
D02: Top Overlay "+" at 5930.54,3533.63 h60 r180
D3: Top Overlay "+" at 4429.96,2406.07 h60
D03: Top Overlay "+" at 5930.54,3308.57 h60 r180
D4: Top Overlay "+" at 4429.96,2631.13 h60
D04: Top Overlay "+" at 5930.54,3083.52 h60 r180
D5: Top Overlay "+" at 4429.96,2856.18 h60
D05: Top Overlay "+" at 5930.54,2858.47 h60 r180
D6: Top Overlay "+" at 4429.96,3081.23 h60
D06: Top Overlay "+" at 5930.54,2633.41 h60 r180
D7: Top Overlay "+" at 4429.96,3306.29 h60
D07: Top Overlay "+" at 5930.54,2408.36 h60 r180
D08: Top Overlay "+" at 5930.54,2183.31 h60 r180
D8: Top Overlay "+" at 4429.96,3531.34 h60
D09: Top Overlay "+" at 5754.2,3758.68 h60 r180
D10: Top Overlay "+" at 5754.2,3533.63 h60 r180
D11: Top Overlay "+" at 5754.2,3308.57 h60 r180
D12: Top Overlay "+" at 5754.2,3083.52 h60 r180
D13: Top Overlay "+" at 5754.2,2858.47 h60 r180
D14: Top Overlay "+" at 5754.2,2633.41 h60 r180
D15: Top Overlay "+" at 5754.2,2408.36 h60 r180
D16: Top Overlay "+" at 5754.2,2183.31 h60 r180
D17: Top Overlay "+" at 5577.87,3758.68 h60 r180
D18: Top Overlay "+" at 5577.87,3533.63 h60 r180
D19: Top Overlay "+" at 5577.87,3308.57 h60 r180
D20: Top Overlay "+" at 5577.87,3083.52 h60 r180
D21: Top Overlay "+" at 5577.87,2858.47 h60 r180
D22: Top Overlay "+" at 5577.87,2633.41 h60 r180
D23: Top Overlay "+" at 5577.87,2408.36 h60 r180
D24: Top Overlay "+" at 5577.87,2183.31 h60 r180
D25: Top Overlay "+" at 5401.53,3758.68 h60 r180
D26: Top Overlay "+" at 5401.53,3533.63 h60 r180
D27: Top Overlay "+" at 5401.53,3308.57 h60 r180
D28: Top Overlay "+" at 5401.53,3083.52 h60 r180
D29: Top Overlay "+" at 5401.53,2858.47 h60 r180
D30: Top Overlay "+" at 5401.53,2633.41 h60 r180
D31: Top Overlay "+" at 5401.53,2408.36 h60 r180
D32: Top Overlay "+" at 5401.53,2183.31 h60 r180
D33: Top Overlay "+" at 5225.19,3758.68 h60 r180
D34: Top Overlay "+" at 5225.19,3533.63 h60 r180
D35: Top Overlay "+" at 5225.19,3308.57 h60 r180
D36: Top Overlay "+" at 5225.19,3083.52 h60 r180
D37: Top Overlay "+" at 5225.19,2858.47 h60 r180
D38: Top Overlay "+" at 5225.19,2633.41 h60 r180
D39: Top Overlay "+" at 5225.19,2408.36 h60 r180
D40: Top Overlay "+" at 5225.19,2183.31 h60 r180
D41: Top Overlay "+" at 5048.86,3758.68 h60 r180
D42: Top Overlay "+" at 5048.86,3533.63 h60 r180
D43: Top Overlay "+" at 5048.86,3308.57 h60 r180
D44: Top Overlay "+" at 5048.86,3083.52 h60 r180
D45: Top Overlay "+" at 5048.86,2858.47 h60 r180
D46: Top Overlay "+" at 5048.86,2633.41 h60 r180
D47: Top Overlay "+" at 5048.86,2408.36 h60 r180
D48: Top Overlay "+" at 5048.86,2183.31 h60 r180
D49: Top Overlay "+" at 4872.52,3758.68 h60 r180
D50: Top Overlay "+" at 4872.52,3533.63 h60 r180
D51: Top Overlay "+" at 4872.52,3308.57 h60 r180
D52: Top Overlay "+" at 4872.52,3083.52 h60 r180
D53: Top Overlay "+" at 4872.52,2858.47 h60 r180
D54: Top Overlay "+" at 4872.52,2633.41 h60 r180
D55: Top Overlay "+" at 4872.52,2408.36 h60 r180
D56: Top Overlay "+" at 4872.52,2183.31 h60 r180
D57: Top Overlay "+" at 4696.18,3758.68 h60 r180
D58: Top Overlay "+" at 4696.18,3533.63 h60 r180
D59: Top Overlay "+" at 4696.18,3308.57 h60 r180
D60: Top Overlay "+" at 4696.18,3083.52 h60 r180
D61: Top Overlay "+" at 4696.18,2858.47 h60 r180
D62: Top Overlay "+" at 4696.18,2633.41 h60 r180
D63: Top Overlay "+" at 4696.18,2408.36 h60 r180
D64: Top Overlay "+" at 4696.18,2183.31 h60 r180
D65: Top Overlay "+" at 1089.01,3544.33 h60 r270
D66: Top Overlay "+" at 824.64,3468.31 h60 r180
D67: Top Overlay "+" at 1089.01,2756.93 h60 r270
DS1: Top Overlay "12" at 4086.46,3327.52 h60 r270; Top Overlay "1" at 3501.46,3297.52 h60 r270